# EAGLE board imu_yz (EAGLE 4.11)
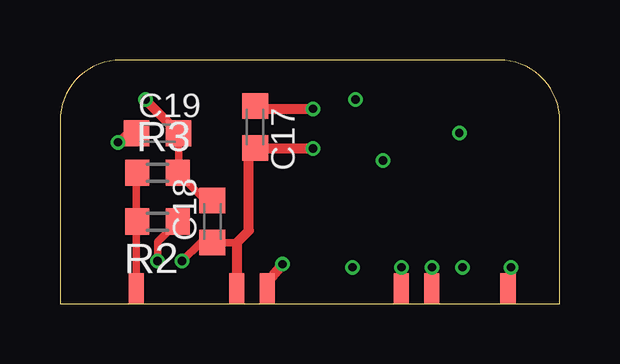
[diagram p0: board, top side]
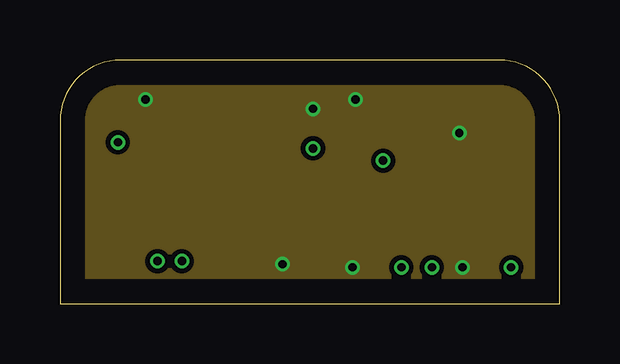
[diagram p1: board, inner layer Route2]
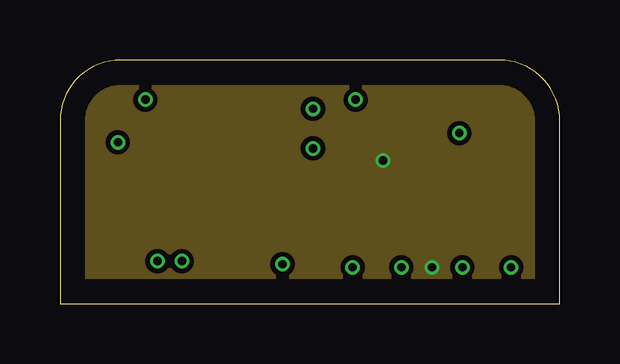
[diagram p2: board, inner layer Route15]
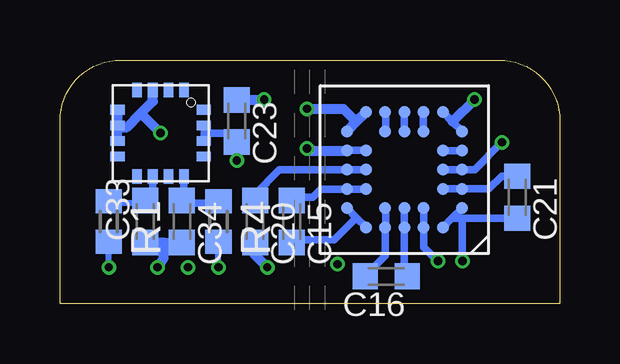
[diagram p3: board, bottom side, seen from below]

Size 20.83 x 10.16 mm. Coordinates in mm from the lower left corner, seen from the top.
Outline: 0,0 20.83,0 20.83,7.62 arc90 18.29,10.16 2.54,10.16 arc90 0,7.62 0,0
Copper layers (1*16): Top 0.035mm / dielectric 1.5mm / Bottom 0.035mm
Design rules "eurocircuits_europrint": minimum track width 0.2mm, minimum drill 0.35mm, track to track 0.2mm, track to pad 0.2mm, pad to pad 0.2mm, via to via 0.2mm, smd to smd 0.2mm, copper to edge 40mil, drill to drill 8mil, minimum pad ring 10mil, minimum via ring 5mil, stop-mask expansion 4mil, vias tented up to drill 0mil, thermal gap 10mil

## Footprints (pad centres in the part's own frame; a part is rotated, then mirrored left to right if it is on the bottom)
C0603K = smd 1.05 x 1.08: 1 -0.875,0; 2 0.875,0
BC-32 = smd 0.5 x 0.5: A2 -1.6,2.4; A3 -0.8,2.4; A4 0,2.4; A5 0.8,2.4; A6 1.6,2.4; B1 -2.4,1.6; B3 -0.8,1.6; B4 0,1.6; B5 0.8,1.6; B7 2.4,1.6; C1 -2.4,0.8; C2 -1.6,0.8; C6 1.6,0.8; C7 2.4,0.8; D1 -2.4,0; D2 -1.6,0; D6 1.6,0; D7 2.4,0; E1 -2.4,-0.8; E2 -1.6,-0.8; E6 1.6,-0.8; E7 2.4,-0.8; F1 -2.4,-1.6; F3 -0.8,-1.6; F4 0,-1.6; F5 0.8,-1.6; F7 2.4,-1.6; G2 -1.6,-2.4; G3 -0.8,-2.4; G4 0,-2.4; G5 0.8,-2.4; G6 1.6,-2.4
R0603 = smd 1 x 1.1: 1 -0.85,0; 2 0.85,0
SOLDER_PAD = smd 0.635 x 1.27: P$1 0,0
LSCFP = smd 0.6 x 0.4: P$1 -1.8,0.975; P$2 -1.8,0.325; P$3 -1.8,-0.325; P$4 -1.8,-0.975; P$9 1.8,-0.975; P$10 1.8,-0.325; P$11 1.8,0.325; P$12 1.8,0.975 | smd 0.4 x 0.6: P$5 -0.975,-1.8; P$6 -0.325,-1.8; P$7 0.325,-1.8; P$8 0.975,-1.8; P$13 0.975,1.8; P$14 0.325,1.8; P$15 -0.325,1.8; P$16 -0.975,1.8

## Placement (x,y rotation side)
C15  22nF  [C0603K]  11.18,3.43 270 bottom
C16  22nF  [C0603K]  7.24,1.14 180 bottom
C17  100nF  [C0603K]  8.13,7.37 270 top
C18  100nF  [C0603K]  6.35,3.43 90 top
C19  100nF  [C0603K]  4.06,7.11 0 top
C20  47nF  [C0603K]  12.7,3.43 270 bottom
C21  22nF  [C0603K]  1.78,4.45 270 bottom
C23  100nF  [C0603K]  13.46,7.62 270 bottom
C33  100nF  [C0603K]  17.27,3.43 90 bottom
C34  100nF  [C0603K]  15.75,3.43 270 bottom
GYRO_X  ADXR  [BC-32]  6.48,5.59 180 bottom
R1  12K  [R0603]  18.8,3.43 270 bottom
R2  12K  [R0603]  4.06,3.43 180 top
R3  12K  [R0603]  4.06,5.46 0 top
R4  12K  [R0603]  14.22,3.43 270 bottom
U$1  SOLDER_PAD  [SOLDER_PAD]  18.67,0.64 0 top
U$2  ADXL320  [LSCFP]  16.64,7.11 270 bottom
U$4  SOLDER_PAD  [SOLDER_PAD]  14.22,0.64 0 top
U$5  SOLDER_PAD  [SOLDER_PAD]  3.17,0.64 0 top
U$6  SOLDER_PAD  [SOLDER_PAD]  7.37,0.64 0 top
U$7  SOLDER_PAD  [SOLDER_PAD]  15.49,0.64 0 top
U$8  SOLDER_PAD  [SOLDER_PAD]  8.64,0.64 0 top

## Library data of the parts
C15-C21 C23 C33 C34 R1-R4 = rcl
GYRO_X U$1 U$2 U$4-U$8 = paparazzi

## Nets
+3V3: C23.2 U$2.P$14 U$2.P$15 U$7.P$1
+5V: C17.2 C18.1 GYRO_X.A3 GYRO_X.B3 GYRO_X.E6 GYRO_X.E7 U$6.P$1
ACCEL_H: R4.2 U$4.P$1
ACCEL_V: R1.2 U$1.P$1
GND: C17.1 C18.2 C19.2 C20.2 C23.1 C33.1 C34.2 GYRO_X.F1 GYRO_X.F7 GYRO_X.G2 GYRO_X.G6 R3.2 U$2.P$3 U$2.P$5 U$2.P$6 U$2.P$7 U$8.P$1
N$3: U$2.P$2
N$6: C21.1 GYRO_X.C1 GYRO_X.C2
N$7: C15.1 GYRO_X.C6 GYRO_X.C7
N$11: C20.1 GYRO_X.D6 GYRO_X.D7
N$12: C16.2 GYRO_X.A5 GYRO_X.B5
N$13: C16.1 GYRO_X.A4 GYRO_X.B4
N$14: C15.2 GYRO_X.A6 GYRO_X.B7
N$17: GYRO_X.E1 GYRO_X.E2
N$19: C19.1 GYRO_X.D1 GYRO_X.D2
N$20: C33.2 R1.1 U$2.P$10
N$32: C34.1 R4.1 U$2.P$12
RATE_X: C21.2 GYRO_X.A2 GYRO_X.B1 R2.1
RATE_X_3V3: R2.2 R3.1 U$5.P$1
ST1: GYRO_X.F5 GYRO_X.G5
ST2: GYRO_X.F4 GYRO_X.G4
TEMP_X: GYRO_X.F3 GYRO_X.G3

## Tracks (layer width: path | path; a pad name or v marks a point on that pad's centre or on a via)
+3V3  (via drill 0.35)
  Top 0.406: U$7.P$1 v15.49,1.52
  Bottom 0.254: U$2.P$14 14.84,6.75 | 14.84,6.75 14.84,7.11 | 14.84,7.11 U$2.P$15 | 14.84,6.75 14.86,6.73 | 14.84,7.11 14.73,7.11 14.72,7.13
  Bottom 0.305: 14.73,7.11 13.84,7.11 | 13.84,7.11 13.83,7.11 | C23.2 13.48,6.75 13.84,7.11
  Bottom 0.406: C23.2 v13.46,5.97
  pour Route15: 0.25,10.03 20.57,10.03 20.57,0.25 0.25,0.25
+5V  (via drill 0.35)
  Top 0.305: v5.08,1.78 5.86,2.55 C18.1 6.98,2.54 7.37,2.54
  Top 0.406: v10.54,6.48 10.53,6.49 C17.2 8.51,6.48 7.87,6.48 7.87,3.05 7.37,2.54 U$6.P$1
  Bottom 0.203: 5.66,3.2 GYRO_X.A3 | 5.66,3.98 GYRO_X.B3 | 8.87,6.4 GYRO_X.E7 | 8.09,6.4 GYRO_X.E6
  Bottom 0.305: 5.66,3.98 5.66,3.2 5.66,2.36 v5.08,1.78 | 8.87,6.4 8.09,6.4 | 8.03,6.38 8.04,6.39 GYRO_X.E6
  Bottom 0.406: GYRO_X.E7 10.45,6.39 v10.54,6.48
ACCEL_H  (via drill 0.35)
  Top 0.254: U$4.P$1 v14.22,1.52
  Bottom 0.254: v14.22,1.52 R4.2
ACCEL_V  (via drill 0.35)
  Top 0.254: v18.8,1.52 18.67,1.27 U$1.P$1
  Bottom 0.254: v18.8,1.52 R1.2
GND  (via drill 0.35)
  Top 0.305: C19.2 4.94,5.48 4.95,5.46 R3.2 5.93,4.45 6.35,4.45 C18.2
  Top 0.406: C19.2 4.95,7.11 v3.56,8.51 | 8.51,8.25 C17.1 8.51,8.13 v10.54,8.13 | U$8.P$1 8.64,0.89 v9.27,1.65
  Bottom 0.203: GYRO_X.F7 8.87,7.2 8.87,7.21 8.85,7.21 | GYRO_X.G2 4.87,7.98 | GYRO_X.G2
  Bottom 0.305: 4.87,7.98 4.48,7.59 GYRO_X.F1 | GYRO_X.F7 8.89,7.2 8.89,7.24 8.83,7.24
  Bottom 0.406: U$2.P$7 U$2.P$6 | U$2.P$6 18.44,7.47 18.41,7.49 18.41,8 18.44,8.02 U$2.P$5 | 16.51,2.55 C34.2 | 16.51,2.55 C33.1 | v12.19,1.52 12.7,2.03 C20.2 | C23.1 13.46,8.51 v12.32,8.51 | v16.76,1.52 16.51,1.91 16.51,2.55 | v3.56,8.51 4.48,7.59 | 8.48,7.59 GYRO_X.G6 | 8.48,7.59 8.83,7.24 | v10.54,8.13 9.02,8.13 8.48,7.59 | 17.46,7.94 v16.64,7.11 | U$2.P$3 16.96,8.44 17.46,7.94 | U$2.P$6 18.41,7.42 18.41,7.37 18.03,7.37 17.46,7.94
  pour Route2: 0.25,10.03 20.57,10.03 20.57,0.25 0.25,0.25
N$6
  Bottom 0.203: GYRO_X.C2 | GYRO_X.C2 4.88,4.8
  Bottom 0.305: GYRO_X.C2 GYRO_X.C1 2.96,4.79 2.43,5.32 C21.1
N$7
  Bottom 0.203: 8.89,4.78 | 8.89,4.78 GYRO_X.C7 | GYRO_X.C6
  Bottom 0.305: GYRO_X.C6 8.89,4.78 9.96,4.78 10.29,4.45 11.18,4.45 C15.1
N$11
  Bottom 0.305: GYRO_X.D6 GYRO_X.D7 11.68,5.59 12.7,4.57 C20.1
N$12
  Bottom 0.203: 7.26,3.17 | GYRO_X.A5 7.26,3.17 | 7.26,3.98 GYRO_X.B5
  Bottom 0.305: 7.26,3.17 7.26,3.98 | 8.25,1.02 C16.2 8.13,1.14 7.28,1.99 GYRO_X.A5
N$13
  Bottom 0.305: GYRO_X.B4 GYRO_X.A4 6.48,1.14 C16.1
N$14
  Bottom 0.203: GYRO_X.B7 8.87,3.99 8.87,3.98 | GYRO_X.B7
  Bottom 0.305: 8.48,3.59 GYRO_X.A6 | 8.87,3.98 8.48,3.59 | 8.48,3.59 9.4,2.67 11.16,2.67 C15.2
N$17
  Bottom 0.203: GYRO_X.E2 | GYRO_X.E2
  Bottom 0.305: GYRO_X.E1 GYRO_X.E2
N$19  (via drill 0.35)
  Top 0.305: v2.41,6.73 2.79,7.11 C19.1
  Bottom 0.305: GYRO_X.D2 GYRO_X.D1 3.56,5.59 v2.41,6.73 v2.4,6.75
N$20
  Bottom 0.254: C33.2 17.27,4.19 18.92,4.19 R1.1
  Bottom 0.305: 17.27,4.32 C33.2 17.27,4.45 16.96,4.45 U$2.P$10
N$32
  Bottom 0.254: C34.1 15.75,4.19 15.71,4.15 15.62,4.15 15.49,4.15
  Bottom 0.305: 15.53,4.23 15.49,4.19 15.49,4.15 15.46,4.19 14.22,4.19 R4.1 | 15.62,4.15 15.62,4.19 15.66,4.19 U$2.P$12
RATE_X  (via drill 0.35)
  Top 0.305: R2.1 4.06,2.58 v4.06,1.78
  Bottom 0.203: GYRO_X.A2 4.89,3.17 4.9,3.17
  Bottom 0.305: 4.48,3.59 GYRO_X.B1 | 4.48,3.59 4.89,3.17 | 4.48,3.59 4.45,3.56 4.06,3.56 | C21.2 1.78,3.56 4.06,3.56 | 4.06,3.56 v4.06,1.78
RATE_X_3V3
  Top 0.305: 3.17,3.47 3.17,3.56 | 3.17,3.47 R2.2 3.17,3.43 | U$5.P$1 3.17,3.43 | 3.17,3.43 3.17,3.47 | R3.1 3.17,5.42 3.17,3.43
ST1
  Bottom 0.203: 7.26,7.19 GYRO_X.F5 | GYRO_X.F5 | GYRO_X.G5 7.26,7.98
  Bottom 0.305: 7.26,7.98 7.26,7.19
ST2
  Bottom 0.305: GYRO_X.G4 GYRO_X.F4
TEMP_X
  Bottom 0.203: GYRO_X.F3 | GYRO_X.F3 | GYRO_X.G3
  Bottom 0.305: GYRO_X.G3 GYRO_X.F3